# EAGLE board Sensors Panel 2 (EAGLE 5.10), part 1 of 2
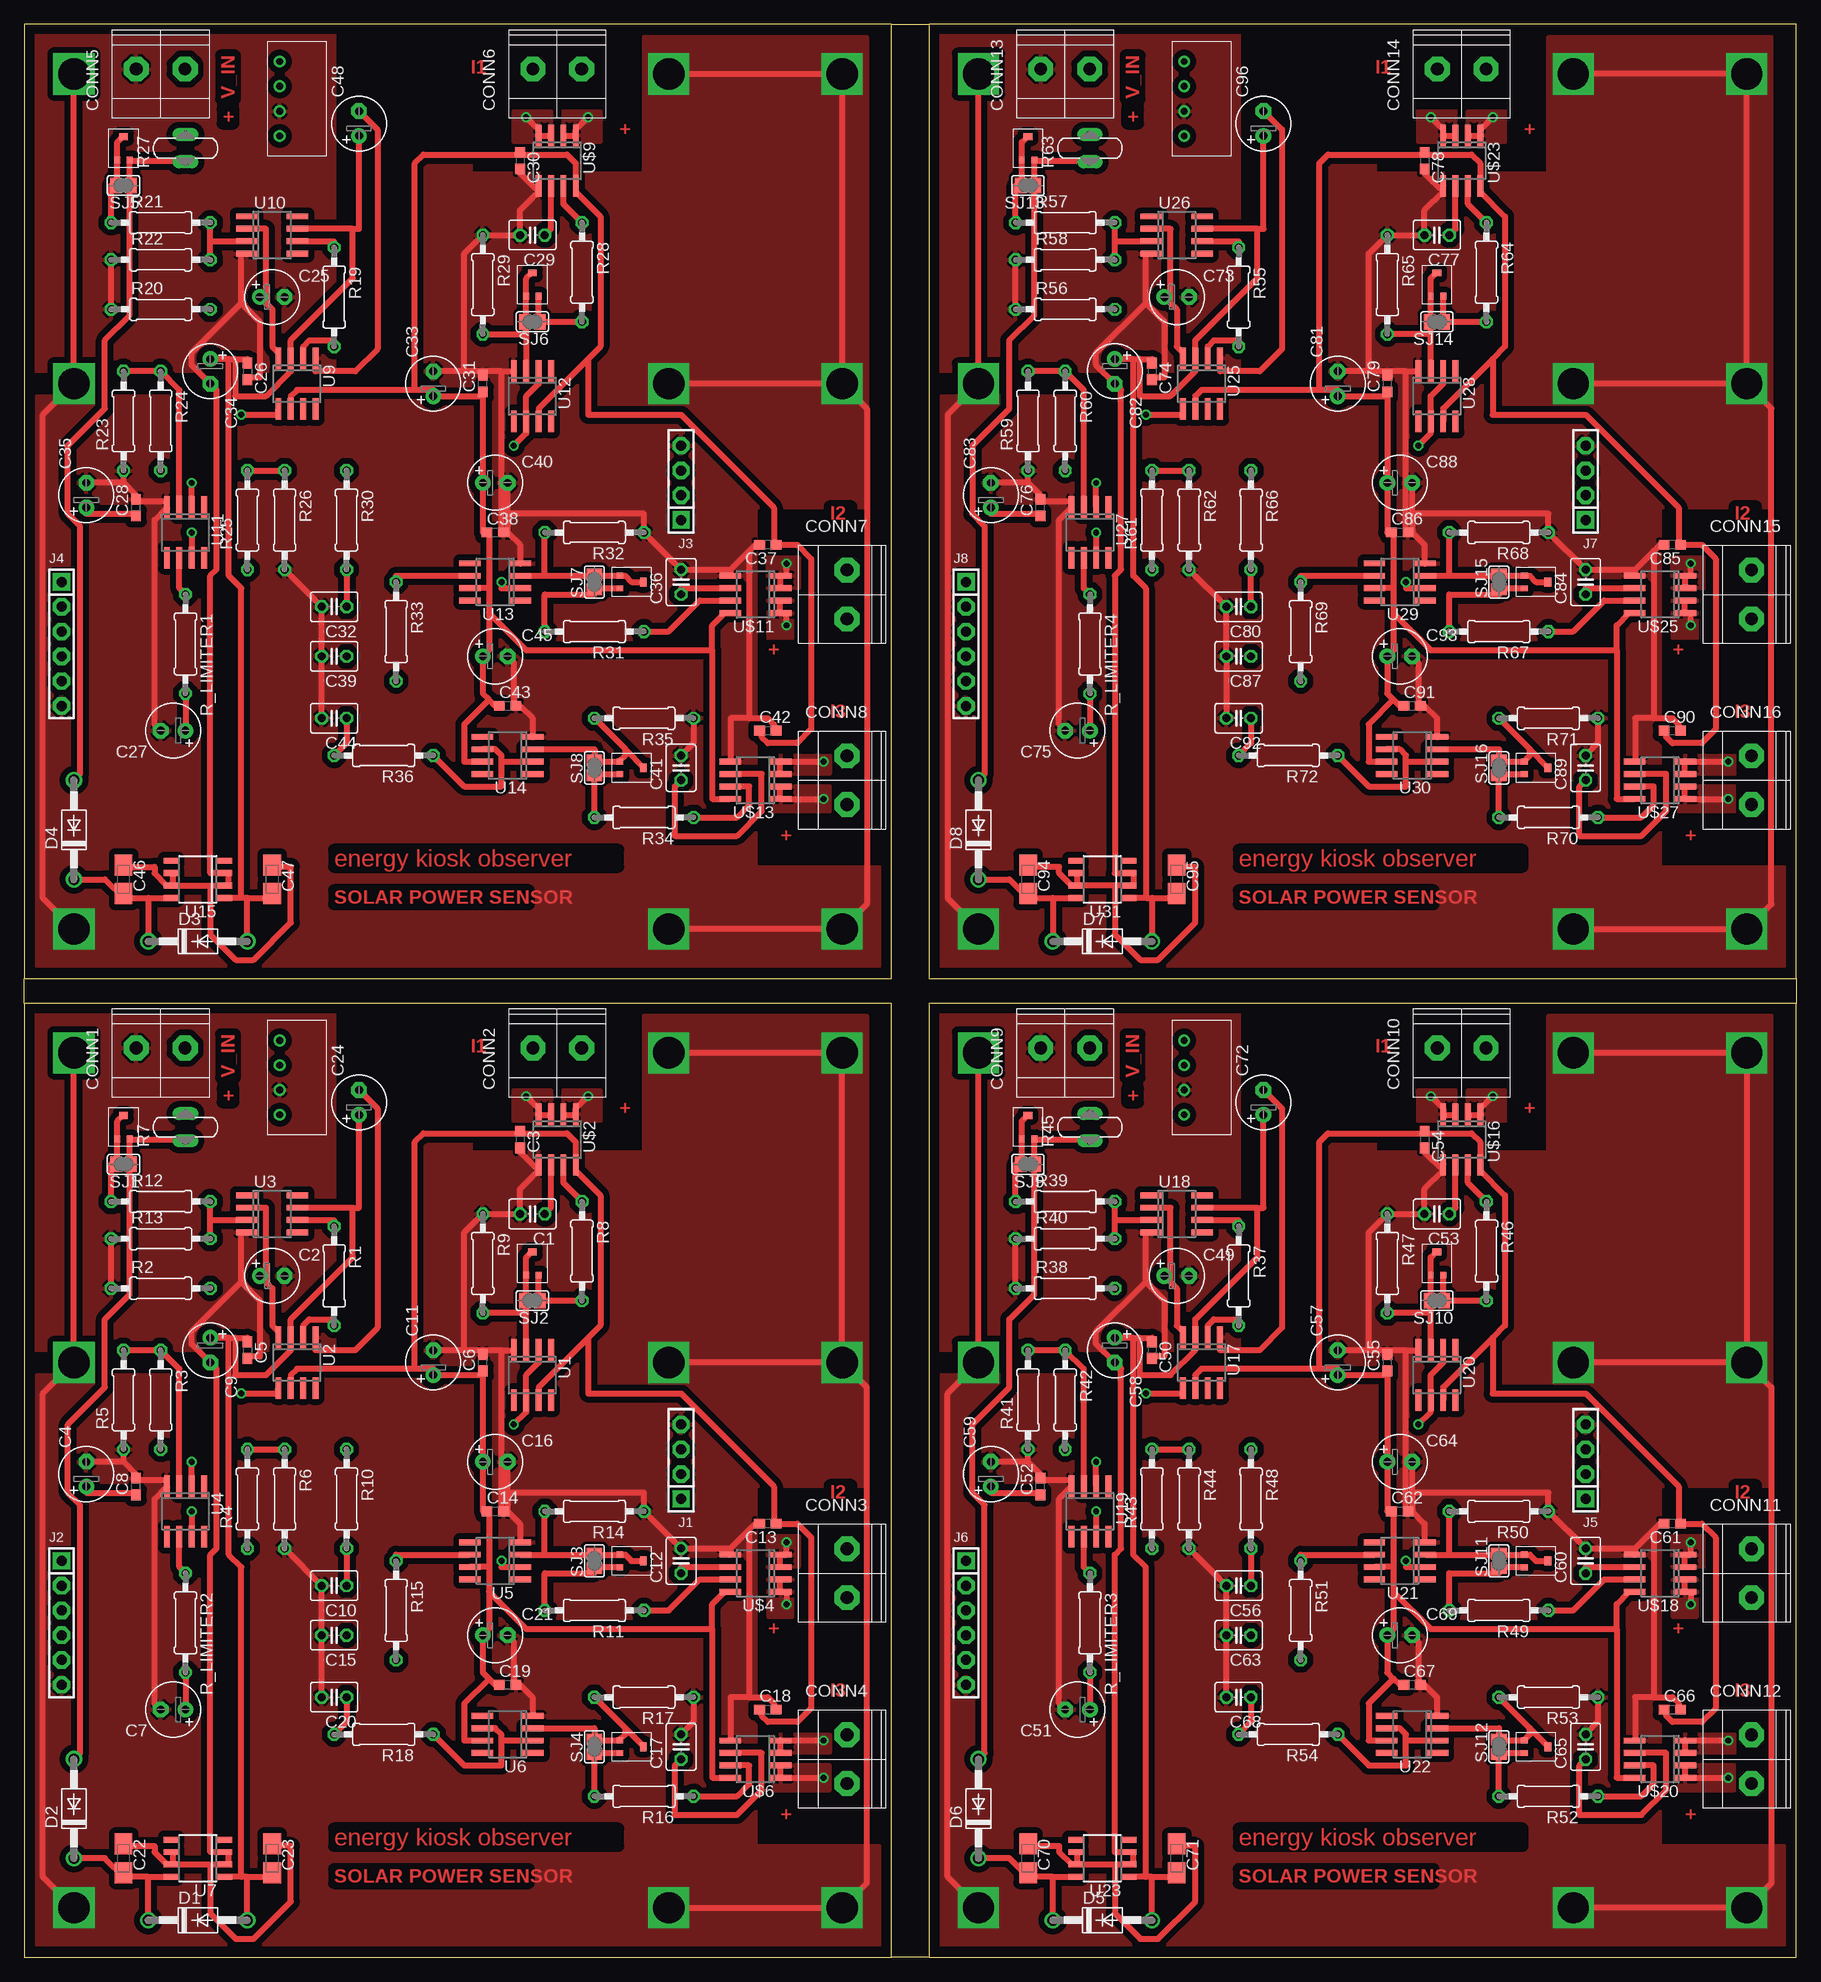
[diagram p0: board, top side]
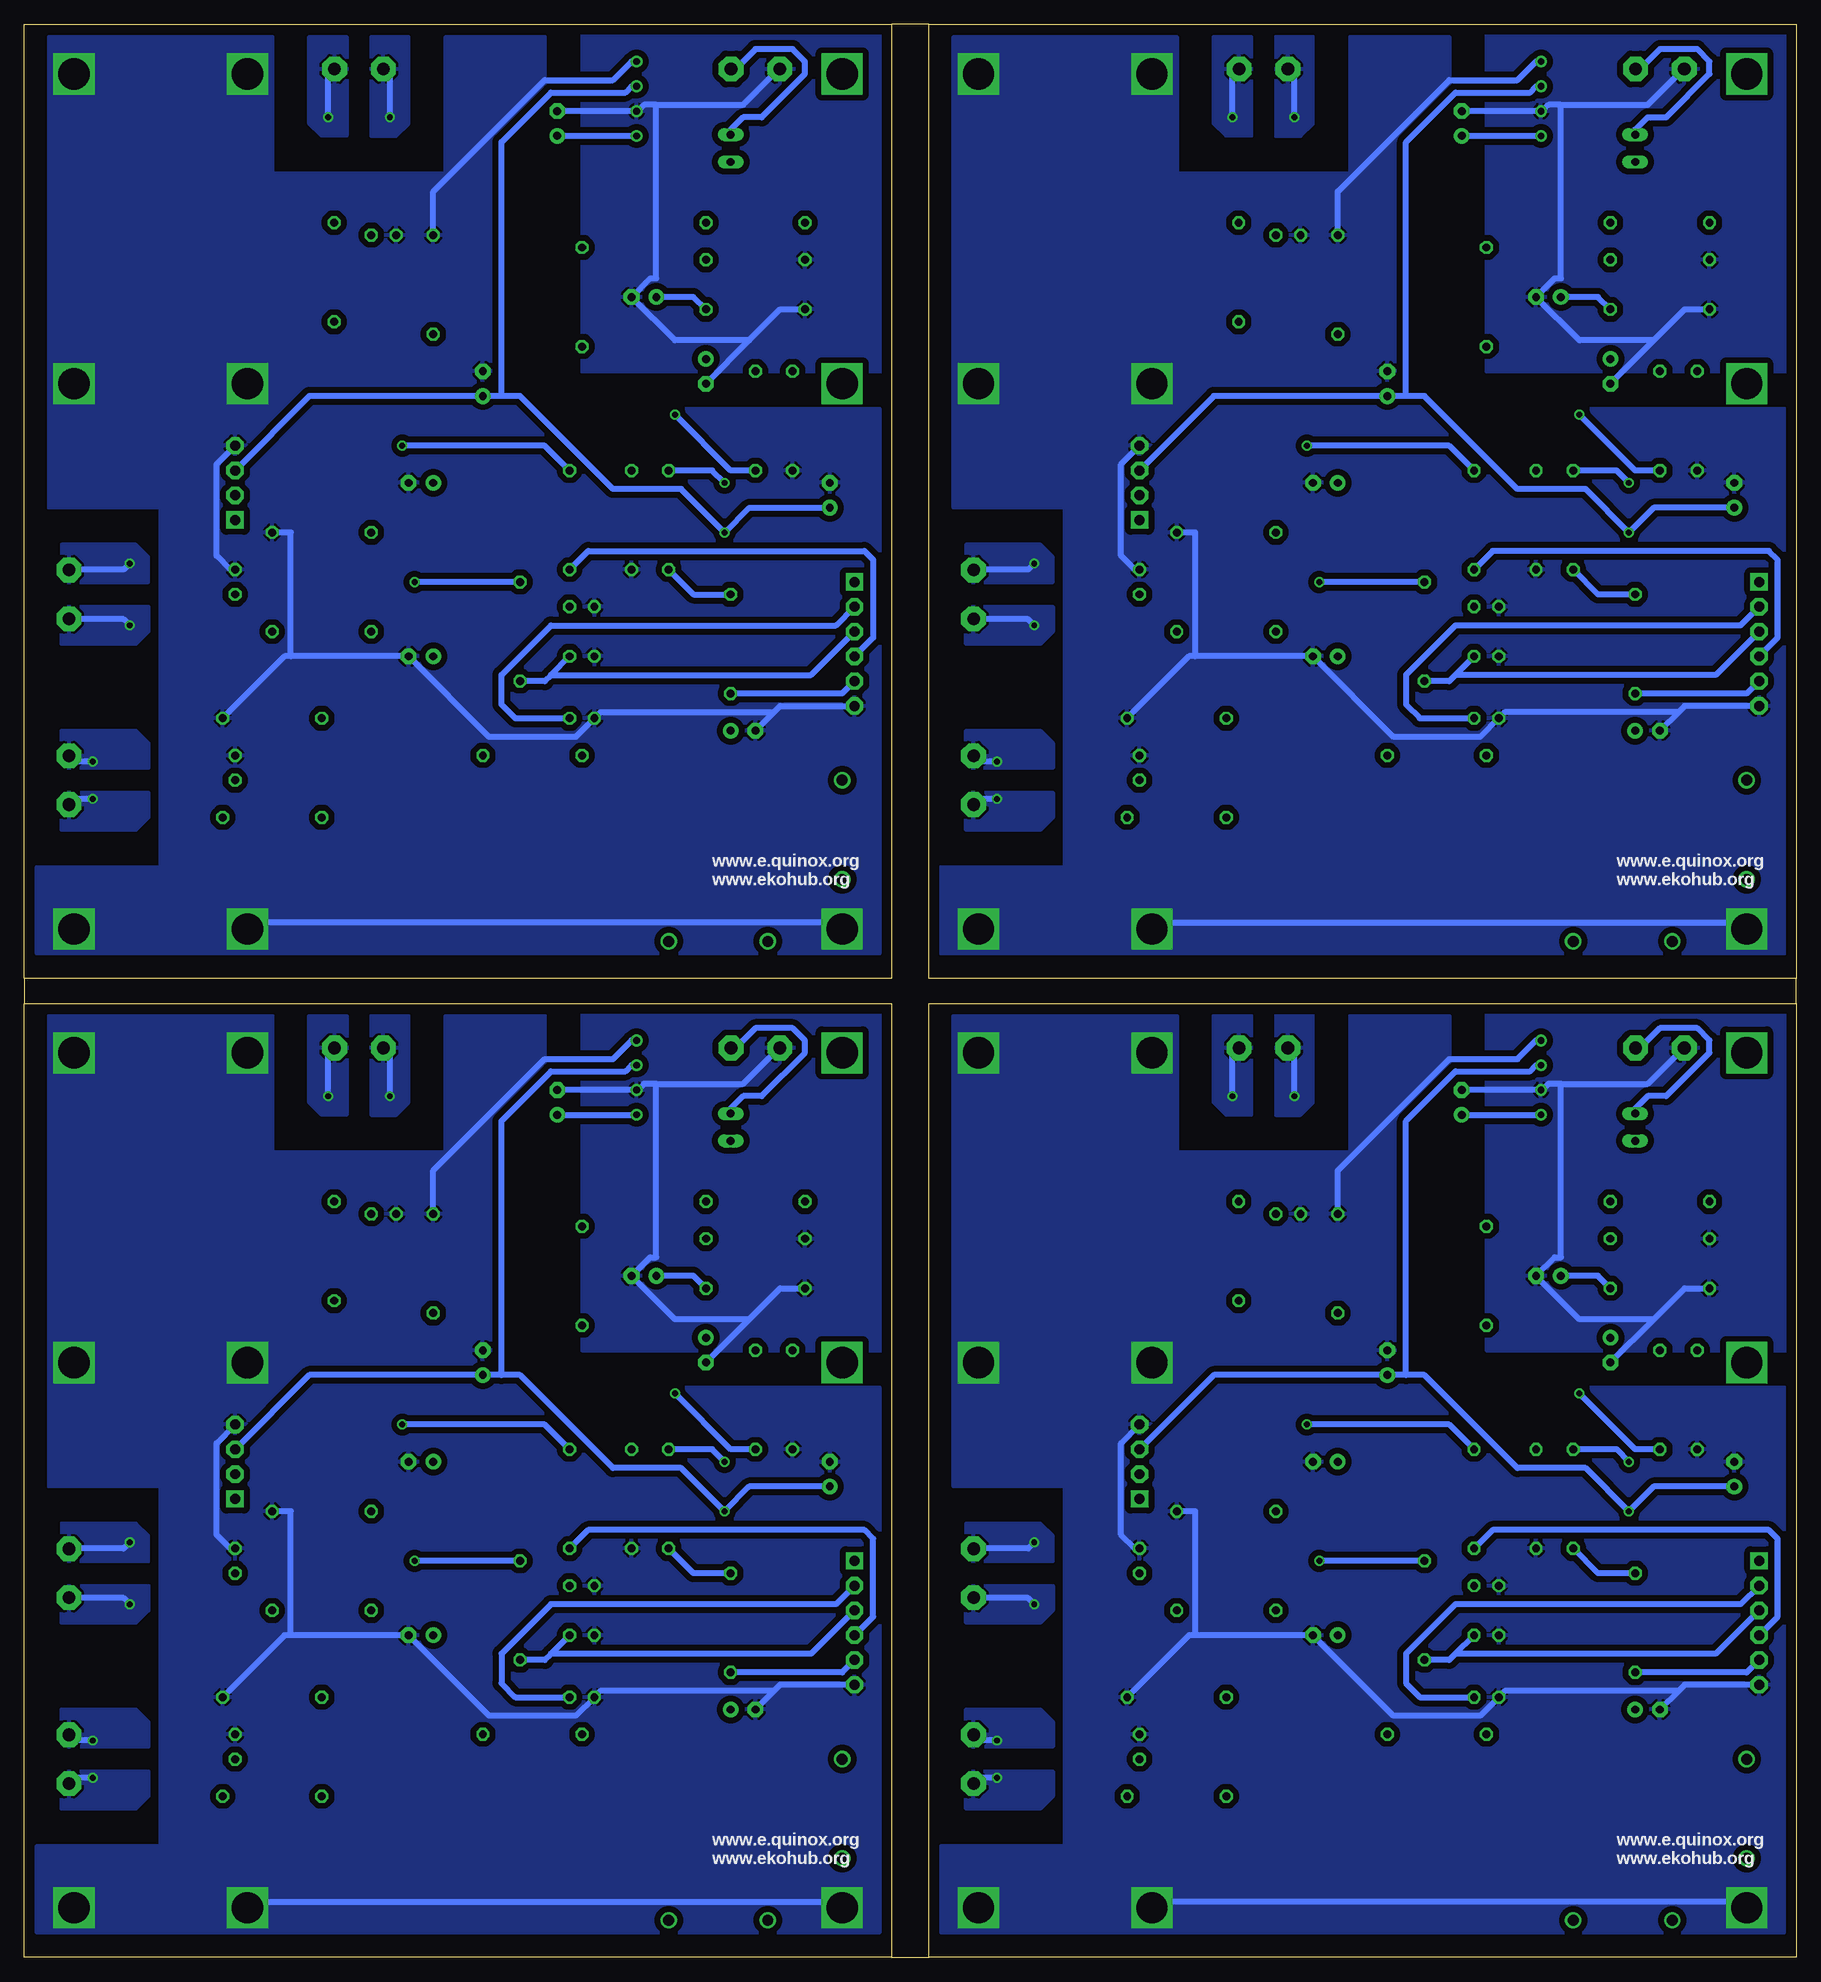
[diagram p1: board, bottom side, seen from below]

Size 181.61 x 198.12 mm. Coordinates in mm from the lower left corner, seen from the top.
Outline: 0,97.79 0,100.33
Outline: 88.9,198.12 92.71,198.12
Outline: 181.61,100.33 181.61,97.79
Outline: 92.71,0 88.9,0
Outline: 88.9,0 0,0 0,97.79
Outline: 88.9,0 88.9,97.79 0,97.79
Outline: 0,100.33 88.9,100.33 88.9,198.12
Outline: 88.9,198.12 0,198.12 0,100.33
Outline: 92.71,0 181.61,0 181.61,97.79
Outline: 181.61,97.79 92.71,97.79 92.71,0
Outline: 181.61,100.33 92.71,100.33 92.71,198.12
Outline: 181.61,100.33 181.61,198.12 92.71,198.12
Copper layers (1*16): Top 0.035mm / dielectric 1.5mm / Bottom 0.035mm
Design rules "default": minimum track width 10mil, minimum drill 24mil, track to track 8mil, track to pad 8mil, pad to pad 8mil, via to via 8mil, smd to smd 8mil, copper to edge 40mil, drill to drill 8mil, minimum pad ring 10mil, minimum via ring 8mil, stop-mask expansion 4mil, vias tented up to drill 0mil, thermal gap 10mil

## Footprints (pad centres in the part's own frame; a part is rotated, then mirrored left to right if it is on the bottom)
C025-030X050 = drill 0.813 octagon: 1 -1.27,0; 2 1.27,0
E2,5-6 = drill 0.813 pad 1.6 round: + -1.27,0 | drill 0.813 pad 1.6 octagon: - 1.27,0
C0603 = smd 1.1 x 1: 1 -0.85,0; 2 0.85,0
A/3216-18W = smd 2.15 x 1.8: + 1.475,0; - -1.475,0
CTB1500-2 = drill 1.3 pad 2.54 octagon: P$1 -2.5,0.5; P$2 2.5,0.5
DO41-10 = drill 1.118 round: A 5.08,0; C -5.08,0
SIP-100-04-40 = drill 1.016 pad 1.778 square: 1 -3.81,0 | drill 1.016 pad 1.778 octagon: 2 -1.27,0; 3 1.27,0; 4 3.81,0
SIP-100-06-40 = drill 1.016 pad 1.778 square: 1 -6.35,0 | drill 1.016 pad 1.778 octagon: 2 -3.81,0; 3 -1.27,0; 4 1.27,0; 5 3.81,0; 6 6.35,0
0207/10 = drill 0.813 octagon: 1 -5.08,0; 2 5.08,0
P660A = drill 0.813 long: 1 -1.397,0; 2 1.397,0
SJ = smd 1.168 x 1.6: 1 -0.762,0; 2 0.762,0
SO8 = smd 0.6 x 2.2: 1 -1.905,-2.6; 2 -0.635,-2.6; 3 0.635,-2.6; 4 1.905,-2.6; 5 1.905,2.6; 6 0.635,2.6; 7 -0.635,2.6; 8 -1.905,2.6
R_PDSO_G8 = smd 0.6 x 1.5: 1 -1.905,-2.75; 2 -0.635,-2.75; 3 0.635,-2.75; 4 1.905,-2.75; 5 1.905,2.75; 6 0.635,2.75; 7 -0.635,2.75; 8 -1.905,2.75
SF_IE_SIP = drill 0.7 round: +VIN -1.27,-1.778; +VOUT 3.81,-1.778; -VIN -3.81,-1.778; -VOUT 1.27,-1.778
MURATA_PVZ2A = smd 0.6 x 0.7: 1 -0.65,-1.2; 3 0.65,-1.2 | smd 0.9 x 0.7: 2 0,1.2

## Placement (x,y rotation side)
C1  [C025-030X050]  52.07,76.2 180 top
C2  [E2,5-6]  25.4,69.85 0 top
C3  [C0603]  50.8,83.82 270 top
C4  [E2,5-6]  6.35,49.53 90 top
C5  [C0603]  22.86,62.23 270 top
C6  [C0603]  46.99,60.96 90 top
C7  [E2,5-6]  15.24,25.4 180 top
C8  [C0603]  11.43,48.26 90 top
C9  [E2,5-6]  19.05,62.23 270 top
C10  [C025-030X050]  31.75,38.1 180 top
C11  [E2,5-6]  41.91,60.96 90 top
C12  [C025-030X050]  67.31,40.64 90 top
C13  [C0603]  76.2,44.45 180 top
C14  [C0603]  48.26,45.72 0 top
C15  [C025-030X050]  31.75,33.02 180 top
C16  [E2,5-6]  48.26,50.8 0 top
C17  [C025-030X050]  67.31,21.59 90 top
C18  [C0603]  76.2,25.4 0 top
C19  [C0603]  49.53,27.94 0 top
C20  [C025-030X050]  31.75,26.67 180 top
C21  [E2,5-6]  48.26,33.02 0 top
C22  0.33uF  [A/3216-18W]  10.16,10.16 270 top
C23  0.33uF  [A/3216-18W]  25.4,10.16 270 top
C24  [E2,5-6]  34.29,87.63 90 top
C25  [E2,5-6]  25.4,170.18 0 top
C26  [C0603]  22.86,162.56 270 top
C27  [E2,5-6]  15.24,125.73 180 top
C28  [C0603]  11.43,148.59 90 top
C29  [C025-030X050]  52.07,176.53 180 top
C30  [C0603]  50.8,184.15 270 top
C31  [C0603]  46.99,161.29 90 top
C32  [C025-030X050]  31.75,138.43 180 top
C33  [E2,5-6]  41.91,161.29 90 top
C34  [E2,5-6]  19.05,162.56 270 top
C35  [E2,5-6]  6.35,149.86 90 top
C36  [C025-030X050]  67.31,140.97 90 top
C37  [C0603]  76.2,144.78 180 top
C38  [C0603]  48.26,146.05 0 top
C39  [C025-030X050]  31.75,133.35 180 top
C40  [E2,5-6]  48.26,151.13 0 top
C41  [C025-030X050]  67.31,121.92 90 top
C42  [C0603]  76.2,125.73 0 top
C43  [C0603]  49.53,128.27 0 top
C44  [C025-030X050]  31.75,127 180 top
C45  [E2,5-6]  48.26,133.35 0 top
C46  0.33uF  [A/3216-18W]  10.16,110.49 270 top
C47  0.33uF  [A/3216-18W]  25.4,110.49 270 top
C48  [E2,5-6]  34.29,187.96 90 top
C49  [E2,5-6]  118.11,69.85 0 top
C50  [C0603]  115.57,62.23 270 top
C51  [E2,5-6]  107.95,25.4 180 top
C52  [C0603]  104.14,48.26 90 top
C53  [C025-030X050]  144.78,76.2 180 top
C54  [C0603]  143.51,83.82 270 top
C55  [C0603]  139.7,60.96 90 top
C56  [C025-030X050]  124.46,38.1 180 top
C57  [E2,5-6]  134.62,60.96 90 top
C58  [E2,5-6]  111.76,62.23 270 top
C59  [E2,5-6]  99.06,49.53 90 top
C60  [C025-030X050]  160.02,40.64 90 top
C61  [C0603]  168.91,44.45 180 top
C62  [C0603]  140.97,45.72 0 top
C63  [C025-030X050]  124.46,33.02 180 top
C64  [E2,5-6]  140.97,50.8 0 top
C65  [C025-030X050]  160.02,21.59 90 top
C66  [C0603]  168.91,25.4 0 top
C67  [C0603]  142.24,27.94 0 top
C68  [C025-030X050]  124.46,26.67 180 top
C69  [E2,5-6]  140.97,33.02 0 top
C70  0.33uF  [A/3216-18W]  102.87,10.16 270 top
C71  0.33uF  [A/3216-18W]  118.11,10.16 270 top
C72  [E2,5-6]  127,87.63 90 top
C73  [E2,5-6]  118.11,170.18 0 top
C74  [C0603]  115.57,162.56 270 top
C75  [E2,5-6]  107.95,125.73 180 top
C76  [C0603]  104.14,148.59 90 top
C77  [C025-030X050]  144.78,176.53 180 top
C78  [C0603]  143.51,184.15 270 top
C79  [C0603]  139.7,161.29 90 top
C80  [C025-030X050]  124.46,138.43 180 top
C81  [E2,5-6]  134.62,161.29 90 top
C82  [E2,5-6]  111.76,162.56 270 top
C83  [E2,5-6]  99.06,149.86 90 top
C84  [C025-030X050]  160.02,140.97 90 top
C85  [C0603]  168.91,144.78 180 top
C86  [C0603]  140.97,146.05 0 top
C87  [C025-030X050]  124.46,133.35 180 top
C88  [E2,5-6]  140.97,151.13 0 top
C89  [C025-030X050]  160.02,121.92 90 top
C90  [C0603]  168.91,125.73 0 top
C91  [C0603]  142.24,128.27 0 top
C92  [C025-030X050]  124.46,127 180 top
C93  [E2,5-6]  140.97,133.35 0 top
C94  0.33uF  [A/3216-18W]  102.87,110.49 270 top
C95  0.33uF  [A/3216-18W]  118.11,110.49 270 top
C96  [E2,5-6]  127,187.96 90 top
CONN1  CTB1500/2  [CTB1500-2]  13.97,92.71 0 top
CONN2  CTB1500/2  [CTB1500-2]  54.61,92.71 0 top
CONN3  CTB1500/2  [CTB1500-2]  83.82,39.37 270 top
CONN4  CTB1500/2  [CTB1500-2]  83.82,20.32 270 top
CONN5  CTB1500/2  [CTB1500-2]  13.97,193.04 0 top
CONN6  CTB1500/2  [CTB1500-2]  54.61,193.04 0 top
CONN7  CTB1500/2  [CTB1500-2]  83.82,139.7 270 top
CONN8  CTB1500/2  [CTB1500-2]  83.82,120.65 270 top
CONN9  CTB1500/2  [CTB1500-2]  106.68,92.71 0 top
CONN10  CTB1500/2  [CTB1500-2]  147.32,92.71 0 top
CONN11  CTB1500/2  [CTB1500-2]  176.53,39.37 270 top
CONN12  CTB1500/2  [CTB1500-2]  176.53,20.32 270 top
CONN13  CTB1500/2  [CTB1500-2]  106.68,193.04 0 top
CONN14  CTB1500/2  [CTB1500-2]  147.32,193.04 0 top
CONN15  CTB1500/2  [CTB1500-2]  176.53,139.7 270 top
CONN16  CTB1500/2  [CTB1500-2]  176.53,120.65 270 top
D1  1N4004  [DO41-10]  17.78,3.81 0 top
D2  1N4004  [DO41-10]  5.08,15.24 90 top
D3  1N4004  [DO41-10]  17.78,104.14 0 top
D4  1N4004  [DO41-10]  5.08,115.57 90 top
D5  1N4004  [DO41-10]  110.49,3.81 0 top
D6  1N4004  [DO41-10]  97.79,15.24 90 top
D7  1N4004  [DO41-10]  110.49,104.14 0 top
D8  1N4004  [DO41-10]  97.79,115.57 90 top
J1  F-1X04-SIP-100-40  [SIP-100-04-40]  67.31,50.8 90 top
J2  F-1X06-SIP-100-40  [SIP-100-06-40]  3.81,34.29 270 top
J3  F-1X04-SIP-100-40  [SIP-100-04-40]  67.31,151.13 90 top
J4  F-1X06-SIP-100-40  [SIP-100-06-40]  3.81,134.62 270 top
J5  F-1X04-SIP-100-40  [SIP-100-04-40]  160.02,50.8 90 top
J6  F-1X06-SIP-100-40  [SIP-100-06-40]  96.52,34.29 270 top
J7  F-1X04-SIP-100-40  [SIP-100-04-40]  160.02,151.13 90 top
J8  F-1X06-SIP-100-40  [SIP-100-06-40]  96.52,134.62 270 top
R1  [0207/10]  31.75,69.85 270 top
R2  [0207/10]  13.97,68.58 0 top
R3  [0207/10]  13.97,57.15 270 top
R4  [0207/10]  22.86,46.99 90 top
R5  [0207/10]  10.16,57.15 90 top
R6  [0207/10]  26.67,46.99 270 top
R7  [P660A]  16.51,85.09 90 top
R8  [0207/10]  57.15,72.39 270 top
R9  [0207/10]  46.99,71.12 270 top
R10  [0207/10]  33.02,46.99 270 top
R11  [0207/10]  58.42,35.56 180 top
R12  [0207/10]  13.97,77.47 0 top
R13  [0207/10]  13.97,73.66 0 top
R14  [0207/10]  58.42,45.72 180 top
R15  [0207/10]  38.1,35.56 270 top
R16  [0207/10]  63.5,16.51 180 top
R17  [0207/10]  63.5,26.67 180 top
R18  [0207/10]  36.83,22.86 180 top
R19  [0207/10]  31.75,170.18 270 top
R20  [0207/10]  13.97,168.91 0 top
R21  [0207/10]  13.97,177.8 0 top
R22  [0207/10]  13.97,173.99 0 top
R23  [0207/10]  10.16,157.48 90 top
R24  [0207/10]  13.97,157.48 270 top
R25  [0207/10]  22.86,147.32 90 top
R26  [0207/10]  26.67,147.32 270 top
R27  [P660A]  16.51,185.42 90 top
R28  [0207/10]  57.15,172.72 270 top
R29  [0207/10]  46.99,171.45 270 top
R30  [0207/10]  33.02,147.32 270 top
R31  [0207/10]  58.42,135.89 180 top
R32  [0207/10]  58.42,146.05 180 top
R33  [0207/10]  38.1,135.89 270 top
R34  [0207/10]  63.5,116.84 180 top
R35  [0207/10]  63.5,127 180 top
R36  [0207/10]  36.83,123.19 180 top
R37  [0207/10]  124.46,69.85 270 top
R38  [0207/10]  106.68,68.58 0 top
R39  [0207/10]  106.68,77.47 0 top
R40  [0207/10]  106.68,73.66 0 top
R41  [0207/10]  102.87,57.15 90 top
R42  [0207/10]  106.68,57.15 270 top
R43  [0207/10]  115.57,46.99 90 top
R44  [0207/10]  119.38,46.99 270 top
R45  [P660A]  109.22,85.09 90 top
R46  [0207/10]  149.86,72.39 270 top
R47  [0207/10]  139.7,71.12 270 top
R48  [0207/10]  125.73,46.99 270 top
R49  [0207/10]  151.13,35.56 180 top
R50  [0207/10]  151.13,45.72 180 top
R51  [0207/10]  130.81,35.56 270 top
R52  [0207/10]  156.21,16.51 180 top
R53  [0207/10]  156.21,26.67 180 top
R54  [0207/10]  129.54,22.86 180 top
R55  [0207/10]  124.46,170.18 270 top
R56  [0207/10]  106.68,168.91 0 top
R57  [0207/10]  106.68,177.8 0 top
R58  [0207/10]  106.68,173.99 0 top
R59  [0207/10]  102.87,157.48 90 top
R60  [0207/10]  106.68,157.48 270 top
R61  [0207/10]  115.57,147.32 90 top
R62  [0207/10]  119.38,147.32 270 top
R63  [P660A]  109.22,185.42 90 top
R64  [0207/10]  149.86,172.72 270 top
R65  [0207/10]  139.7,171.45 270 top
R66  [0207/10]  125.73,147.32 270 top
R67  [0207/10]  151.13,135.89 180 top
R68  [0207/10]  151.13,146.05 180 top
R69  [0207/10]  130.81,135.89 270 top
R70  [0207/10]  156.21,116.84 180 top
R71  [0207/10]  156.21,127 180 top
R72  [0207/10]  129.54,123.19 180 top
R_LIMITER1  [0207/10]  16.51,134.62 270 top
R_LIMITER2  [0207/10]  16.51,34.29 270 top
R_LIMITER3  [0207/10]  109.22,34.29 270 top
R_LIMITER4  [0207/10]  109.22,134.62 270 top
SJ1  [SJ]  10.16,81.28 180 top
SJ2  [SJ]  52.07,67.31 180 top
SJ3  [SJ]  58.42,40.64 90 top
SJ4  [SJ]  58.42,21.59 90 top
SJ5  [SJ]  10.16,181.61 180 top
SJ6  [SJ]  52.07,167.64 180 top
SJ7  [SJ]  58.42,140.97 90 top
SJ8  [SJ]  58.42,121.92 90 top
SJ9  [SJ]  102.87,81.28 180 top
SJ10  [SJ]  144.78,67.31 180 top
SJ11  [SJ]  151.13,40.64 90 top
SJ12  [SJ]  151.13,21.59 90 top
SJ13  [SJ]  102.87,181.61 180 top
SJ14  [SJ]  144.78,167.64 180 top
SJ15  [SJ]  151.13,140.97 90 top
SJ16  [SJ]  151.13,121.92 90 top
U1  MCP601  [SO8]  52.07,59.69 180 top
U2  IL300  [SO8]  27.94,60.96 180 top
U3  MCP601  [SO8]  25.4,76.2 270 top
U4  MCP601  [SO8]  16.51,45.72 180 top
U5  MCP601  [SO8]  48.26,40.64 90 top
U6  MCP601  [SO8]  49.53,22.86 90 top
U7  UA7805  [R_PDSO_G8]  17.78,10.16 90 top
U8  XP_IE_1W_DCDC  [SF_IE_SIP]  27.94,90.17 270 top
U9  IL300  [SO8]  27.94,161.29 180 top
U10  MCP601  [SO8]  25.4,176.53 270 top
U11  MCP601  [SO8]  16.51,146.05 180 top
U12  MCP601  [SO8]  52.07,160.02 180 top
U13  MCP601  [SO8]  48.26,140.97 90 top
U14  MCP601  [SO8]  49.53,123.19 90 top
U15  UA7805  [R_PDSO_G8]  17.78,110.49 90 top
U16  XP_IE_1W_DCDC  [SF_IE_SIP]  27.94,190.5 270 top
U17  IL300  [SO8]  120.65,60.96 180 top
U18  MCP601  [SO8]  118.11,76.2 270 top
U19  MCP601  [SO8]  109.22,45.72 180 top
U20  MCP601  [SO8]  144.78,59.69 180 top
U21  MCP601  [SO8]  140.97,40.64 90 top
U22  MCP601  [SO8]  142.24,22.86 90 top
U23  UA7805  [R_PDSO_G8]  110.49,10.16 90 top
U24  XP_IE_1W_DCDC  [SF_IE_SIP]  120.65,90.17 270 top
U25  IL300  [SO8]  120.65,161.29 180 top
U26  MCP601  [SO8]  118.11,176.53 270 top
U27  MCP601  [SO8]  109.22,146.05 180 top
U28  MCP601  [SO8]  144.78,160.02 180 top
U29  MCP601  [SO8]  140.97,140.97 90 top
U30  MCP601  [SO8]  142.24,123.19 90 top
U31  UA7805  [R_PDSO_G8]  110.49,110.49 90 top
U32  XP_IE_1W_DCDC  [SF_IE_SIP]  120.65,190.5 270 top
U$1  VRES_MURATA_PVZ2  [MURATA_PVZ2A]  10.16,85.09 0 top
U$2  ACS712  [SO8]  54.61,83.82 180 top
U$3  VRES_MURATA_PVZ2  [MURATA_PVZ2A]  52.07,71.12 0 top
U$4  ACS712  [SO8]  74.93,39.37 90 top
U$5  VRES_MURATA_PVZ2  [MURATA_PVZ2A]  62.23,40.64 270 top
U$6  ACS712  [SO8]  74.93,20.32 90 top
U$7  VRES_MURATA_PVZ2  [MURATA_PVZ2A]  62.23,21.59 270 top
U$8  VRES_MURATA_PVZ2  [MURATA_PVZ2A]  10.16,185.42 0 top
U$9  ACS712  [SO8]  54.61,184.15 180 top
U$10  VRES_MURATA_PVZ2  [MURATA_PVZ2A]  52.07,171.45 0 top
U$11  ACS712  [SO8]  74.93,139.7 90 top
U$12  VRES_MURATA_PVZ2  [MURATA_PVZ2A]  62.23,140.97 270 top
U$13  ACS712  [SO8]  74.93,120.65 90 top
U$14  VRES_MURATA_PVZ2  [MURATA_PVZ2A]  62.23,121.92 270 top
U$15  VRES_MURATA_PVZ2  [MURATA_PVZ2A]  102.87,85.09 0 top
U$16  ACS712  [SO8]  147.32,83.82 180 top
U$17  VRES_MURATA_PVZ2  [MURATA_PVZ2A]  144.78,71.12 0 top
U$18  ACS712  [SO8]  167.64,39.37 90 top
U$19  VRES_MURATA_PVZ2  [MURATA_PVZ2A]  154.94,40.64 270 top
U$20  ACS712  [SO8]  167.64,20.32 90 top
U$21  VRES_MURATA_PVZ2  [MURATA_PVZ2A]  154.94,21.59 270 top
U$22  VRES_MURATA_PVZ2  [MURATA_PVZ2A]  102.87,185.42 0 top
U$23  ACS712  [SO8]  147.32,184.15 180 top
U$24  VRES_MURATA_PVZ2  [MURATA_PVZ2A]  144.78,171.45 0 top
U$25  ACS712  [SO8]  167.64,139.7 90 top
U$26  VRES_MURATA_PVZ2  [MURATA_PVZ2A]  154.94,140.97 270 top
U$27  ACS712  [SO8]  167.64,120.65 90 top
U$28  VRES_MURATA_PVZ2  [MURATA_PVZ2A]  154.94,121.92 270 top

## Library data of the parts
C1-C96 R1-R6 R8-R26 R28-R44 R46-R62 R64-R72 R_LIMITER1-R_LIMITER4 = resistor
CONN1-CONN16 U1-U32 U$1-U$28 = eko-parts
D1-D8 = diode
J1-J8 = con-headers-jp
R7 R27 R45 R63 = ptc-ntc; OC_FARNELL: unknown; OC_NEWARK: unknown
SJ1-SJ16 = jumper

## Nets
+5V/1: C26.1 C34.+ C47.+ C48.+ D3.A U9.3 U10.7 U15.1 U16.+VOUT
+5V/2: C5.1 C9.+ C23.+ C24.+ D1.A U2.3 U3.7 U7.1 U8.+VOUT
+5V/3: C3.1 C4.+ C6.1 C8.1 C11.+ C13.1 C14.1 C16.+ C18.1 C19.1 C21.+ J1.3 U1.7 U2.6 U4.7 U5.7 U6.7 U8.+VIN U$2.8 U$4.8 U$6.8
+5V/4: C28.1 C30.1 C31.1 C33.+ C35.+ C37.1 C38.1 C40.+ C42.1 C43.1 C45.+ J3.3 U9.6 U11.7 U12.7 U13.7 U14.7 U16.+VIN U$9.8 U$11.8 U$13.8
+5V/5: C50.1 C58.+ C71.+ C72.+ D5.A U17.3 U18.7 U23.1 U24.+VOUT
+5V/6: C52.1 C54.1 C55.1 C57.+ C59.+ C61.1 C62.1 C64.+ C66.1 C67.1 C69.+ J5.3 U17.6 U19.7 U20.7 U21.7 U22.7 U24.+VIN U$16.8 U$18.8 U$20.8
+5V/7: C74.1 C82.+ C95.+ C96.+ D7.A U25.3 U26.7 U31.1 U32.+VOUT
+5V/8: C76.1 C78.1 C79.1 C81.+ C83.+ C85.1 C86.1 C88.+ C90.1 C91.1 C93.+ J7.3 U25.6 U27.7 U28.7 U29.7 U30.7 U32.+VIN U$23.8 U$25.8 U$27.8
GND1: C25.- C26.2 C34.- C46.- C47.- C48.- CONN5.P$1 R20.1 R22.1 U9.1 U10.4 U15.2 U15.3 U15.6 U15.7 U16.-VOUT
GND2: C2.- C5.2 C9.- C22.- C23.- C24.- CONN1.P$1 R2.1 R13.1 U2.1 U3.4 U7.2 U7.3 U7.6 U7.7 U8.-VOUT
GND3: C1.2 C3.2 C4.- C6.2 C7.- C8.2 C10.2 C11.- C12.2 C13.2 C14.2 C15.2 C16.- C17.2 C18.2 C19.2 C20.2 C21.- J1.4 J2.6 R5.1 R6.2 R9.1 R14.1 R17.1 U1.4 U4.4 U5.4 U6.4 U8.-VIN U$2.5 U$4.5 U$6.5
GND4: C27.- C28.2 C29.2 C30.2 C31.2 C32.2 C33.- C35.- C36.2 C37.2 C38.2 C39.2 C40.- C41.2 C42.2 C43.2 C44.2 C45.- J3.4 J4.6 R23.1 R26.2 R29.1 R32.1 R35.1 U11.4 U12.4 U13.4 U14.4 U16.-VIN U$9.5 U$11.5 U$13.5
GND5: C49.- C50.2 C58.- C70.- C71.- C72.- CONN9.P$1 R38.1 R40.1 U17.1 U18.4 U23.2 U23.3 U23.6 U23.7 U24.-VOUT
GND6: C51.- C52.2 C53.2 C54.2 C55.2 C56.2 C57.- C59.- C60.2 C61.2 C62.2 C63.2 C64.- C65.2 C66.2 C67.2 C68.2 C69.- J5.4 J6.6 R41.1 R44.2 R47.1 R50.1 R53.1 U19.4 U20.4 U21.4 U22.4 U24.-VIN U$16.5 U$18.5 U$20.5
GND7: C73.- C74.2 C82.- C94.- C95.- C96.- CONN13.P$1 R56.1 R58.1 U25.1 U26.4 U31.2 U31.3 U31.6 U31.7 U32.-VOUT
GND8: C75.- C76.2 C77.2 C78.2 C79.2 C80.2 C81.- C83.- C84.2 C85.2 C86.2 C87.2 C88.- C89.2 C90.2 C91.2 C92.2 C93.- J7.4 J8.6 R59.1 R62.2 R65.1 R68.1 R71.1 U27.4 U28.4 U29.4 U30.4 U32.-VIN U$23.5 U$25.5 U$27.5
I_OUT1: C10.1 J2.4 R10.2
I_OUT2: C15.1 J2.3 R15.2
I_OUT3: C20.1 J2.2 R18.2
I_OUT4: C39.1 J4.3 R33.2
I_OUT5: C44.1 J4.2 R36.2
I_OUT6: C32.1 J4.4 R30.2
I_OUT7: C63.1 J6.3 R51.2
I_OUT8: C68.1 J6.2 R54.2
I_OUT9: C56.1 J6.4 R48.2
I_OUT10: C87.1 J8.3 R69.2
I_OUT11: C92.1 J8.2 R72.2
I_OUT12: C80.1 J8.4 R66.2
N$1: R1.2 U2.2
N$2: R1.1 U3.6
N$3: C2.+ R2.2 U2.4 U3.2
N$4: R8.2 SJ2.1 U$3.3
N$5: CONN1.P$2 R7.2
N$6: R4.1 R_LIMITER2.1 U4.6
N$7: R3.2 U2.5
N$8: R4.2 R6.1 U4.2
N$9: CONN2.P$2 U$2.1 U$2.2
N$10: CONN2.P$1 U$2.3 U$2.4
N$11: R10.1 U1.2 U1.6
N$12: R12.2 R13.2 U3.3
N$13: C1.1 U$2.6
N$14: CONN3.P$2 U$4.1 U$4.2
N$15: CONN3.P$1 U$4.3 U$4.4
N$16: R8.1 U$2.7
N$17: R9.2 SJ2.2 U1.3 U$3.1 U$3.2
N$18: R12.1 SJ1.2 U$1.1 U$1.2
N$19: CONN4.P$2 U$6.1 U$6.2
N$20: C12.1 U$4.6
N$21: R11.1 U$4.7
N$22: R14.2 SJ3.2 U5.3 U$5.1 U$5.2
N$23: R11.2 SJ3.1 U$5.3
N$24: R15.1 U5.2 U5.6
N$25: CONN4.P$1 U$6.3 U$6.4
N$26: C17.1 U$6.6
N$27: R16.1 U$6.7
N$28: R17.2 SJ4.2 U6.3 U$7.1 U$7.2
N$29: R16.2 SJ4.1 U$7.3
N$30: R18.1 U6.2 U6.6
N$31: C22.+ D1.C D2.C U7.8
N$32: R19.1 U10.6
N$33: C25.+ R20.2 U9.4 U10.2
N$34: R19.2 U9.2
N$35: R25.1 R_LIMITER1.1 U11.6
N$36: R21.2 R22.2 U10.3
N$37: R24.2 U9.5
N$38: R25.2 R26.1 U11.2
N$39: CONN5.P$2 R27.2
N$40: CONN6.P$2 U$9.1 U$9.2
N$41: CONN6.P$1 U$9.3 U$9.4
N$42: C29.1 U$9.6
N$43: R28.1 U$9.7
N$44: R29.2 SJ6.2 U12.3 U$10.1 U$10.2
N$45: R21.1 SJ5.2 U$8.1 U$8.2
N$46: R28.2 SJ6.1 U$10.3
N$47: R30.1 U12.2 U12.6
N$48: CONN7.P$2 U$11.1 U$11.2
N$49: CONN7.P$1 U$11.3 U$11.4
N$50: C36.1 U$11.6
N$51: R31.1 U$11.7
N$52: R32.2 SJ7.2 U13.3 U$12.1 U$12.2
N$53: R31.2 SJ7.1 U$12.3
N$54: R33.1 U13.2 U13.6
N$55: CONN8.P$2 U$13.1 U$13.2
N$56: CONN8.P$1 U$13.3 U$13.4
N$57: C41.1 U$13.6
N$58: R34.1 U$13.7
N$59: R35.2 SJ8.2 U14.3 U$14.1 U$14.2
N$60: R34.2 SJ8.1 U$14.3
N$61: R36.1 U14.2 U14.6
N$62: C46.+ D3.C D4.C U15.8
N$63: R37.1 U18.6
N$64: C49.+ R38.2 U17.4 U18.2
N$65: R37.2 U17.2
N$66: R43.1 R_LIMITER3.1 U19.6
N$67: R39.2 R40.2 U18.3
N$68: R42.2 U17.5
N$69: R43.2 R44.1 U19.2
N$70: CONN9.P$2 R45.2
N$71: CONN10.P$2 U$16.1 U$16.2
N$72: CONN10.P$1 U$16.3 U$16.4
N$73: C53.1 U$16.6
N$74: R46.1 U$16.7
N$75: R47.2 SJ10.2 U20.3 U$17.1 U$17.2
N$76: R39.1 SJ9.2 U$15.1 U$15.2
N$77: R46.2 SJ10.1 U$17.3
N$78: R48.1 U20.2 U20.6
N$79: CONN11.P$2 U$18.1 U$18.2
N$80: CONN11.P$1 U$18.3 U$18.4
N$81: C60.1 U$18.6
N$82: R49.1 U$18.7
N$83: R50.2 SJ11.2 U21.3 U$19.1 U$19.2
N$84: R49.2 SJ11.1 U$19.3
N$85: R51.1 U21.2 U21.6
N$86: CONN12.P$2 U$20.1 U$20.2
N$87: CONN12.P$1 U$20.3 U$20.4
N$88: C65.1 U$20.6
N$89: R52.1 U$20.7
N$90: R53.2 SJ12.2 U22.3 U$21.1 U$21.2
N$91: R52.2 SJ12.1 U$21.3
N$92: R54.1 U22.2 U22.6
N$93: C70.+ D5.C D6.C U23.8
N$94: R55.1 U26.6
N$95: C73.+ R56.2 U25.4 U26.2
N$96: R55.2 U25.2
N$97: R61.1 R_LIMITER4.1 U27.6
N$98: R57.2 R58.2 U26.3
N$99: R60.2 U25.5
N$100: R61.2 R62.1 U27.2
N$101: CONN13.P$2 R63.2
N$102: CONN14.P$2 U$23.1 U$23.2
N$103: CONN14.P$1 U$23.3 U$23.4
N$104: C77.1 U$23.6
N$105: R64.1 U$23.7
N$106: R65.2 SJ14.2 U28.3 U$24.1 U$24.2
N$107: R57.1 SJ13.2 U$22.1 U$22.2
N$108: R64.2 SJ14.1 U$24.3
N$109: R66.1 U28.2 U28.6
N$110: CONN15.P$2 U$25.1 U$25.2
N$111: CONN15.P$1 U$25.3 U$25.4
N$112: C84.1 U$25.6
N$113: R67.1 U$25.7
N$114: R68.2 SJ15.2 U29.3 U$26.1 U$26.2
N$115: R67.2 SJ15.1 U$26.3
N$116: R69.1 U29.2 U29.6
N$117: CONN16.P$2 U$27.1 U$27.2
N$118: CONN16.P$1 U$27.3 U$27.4
N$119: C89.1 U$27.6
N$120: R70.1 U$27.7
N$121: R71.2 SJ16.2 U30.3 U$28.1 U$28.2
N$122: R70.2 SJ16.1 U$28.3
N$123: R72.1 U30.2 U30.6
N$124: C94.+ D7.C D8.C U31.8
U1: R23.2 R24.1 U11.3
U2: R41.2 R42.1 U19.3
U3: R59.2 R60.1 U27.3
U4: R3.1 R5.2 U4.3
V+_PANEL: D2.A R7.1 SJ1.1 U$1.3
V+_PANEL1: D4.A R27.1 SJ5.1 U$8.3
V+_PANEL2: D6.A R45.1 SJ9.1 U$15.3
V+_PANEL3: D8.A R63.1 SJ13.1 U$22.3
V_OUT: C7.+ J2.5 R_LIMITER2.2
V_OUT1: C27.+ J4.5 R_LIMITER1.2
V_OUT2: C51.+ J6.5 R_LIMITER3.2
V_OUT3: C75.+ J8.5 R_LIMITER4.2